# Altium PCB Wikiot-III.PcbDoc (part 1 of 2)
Units mil, origin at the board's own origin, x right, y up, seen from the top; angles counter-clockwise.
Board outline 3930 x 3935 mil, 2 copper layers (Top Layer, Bottom Layer); 211 components, 261 nets, 942 pads, 236 vias.
Unrouted connection lines stored in the file: 45.
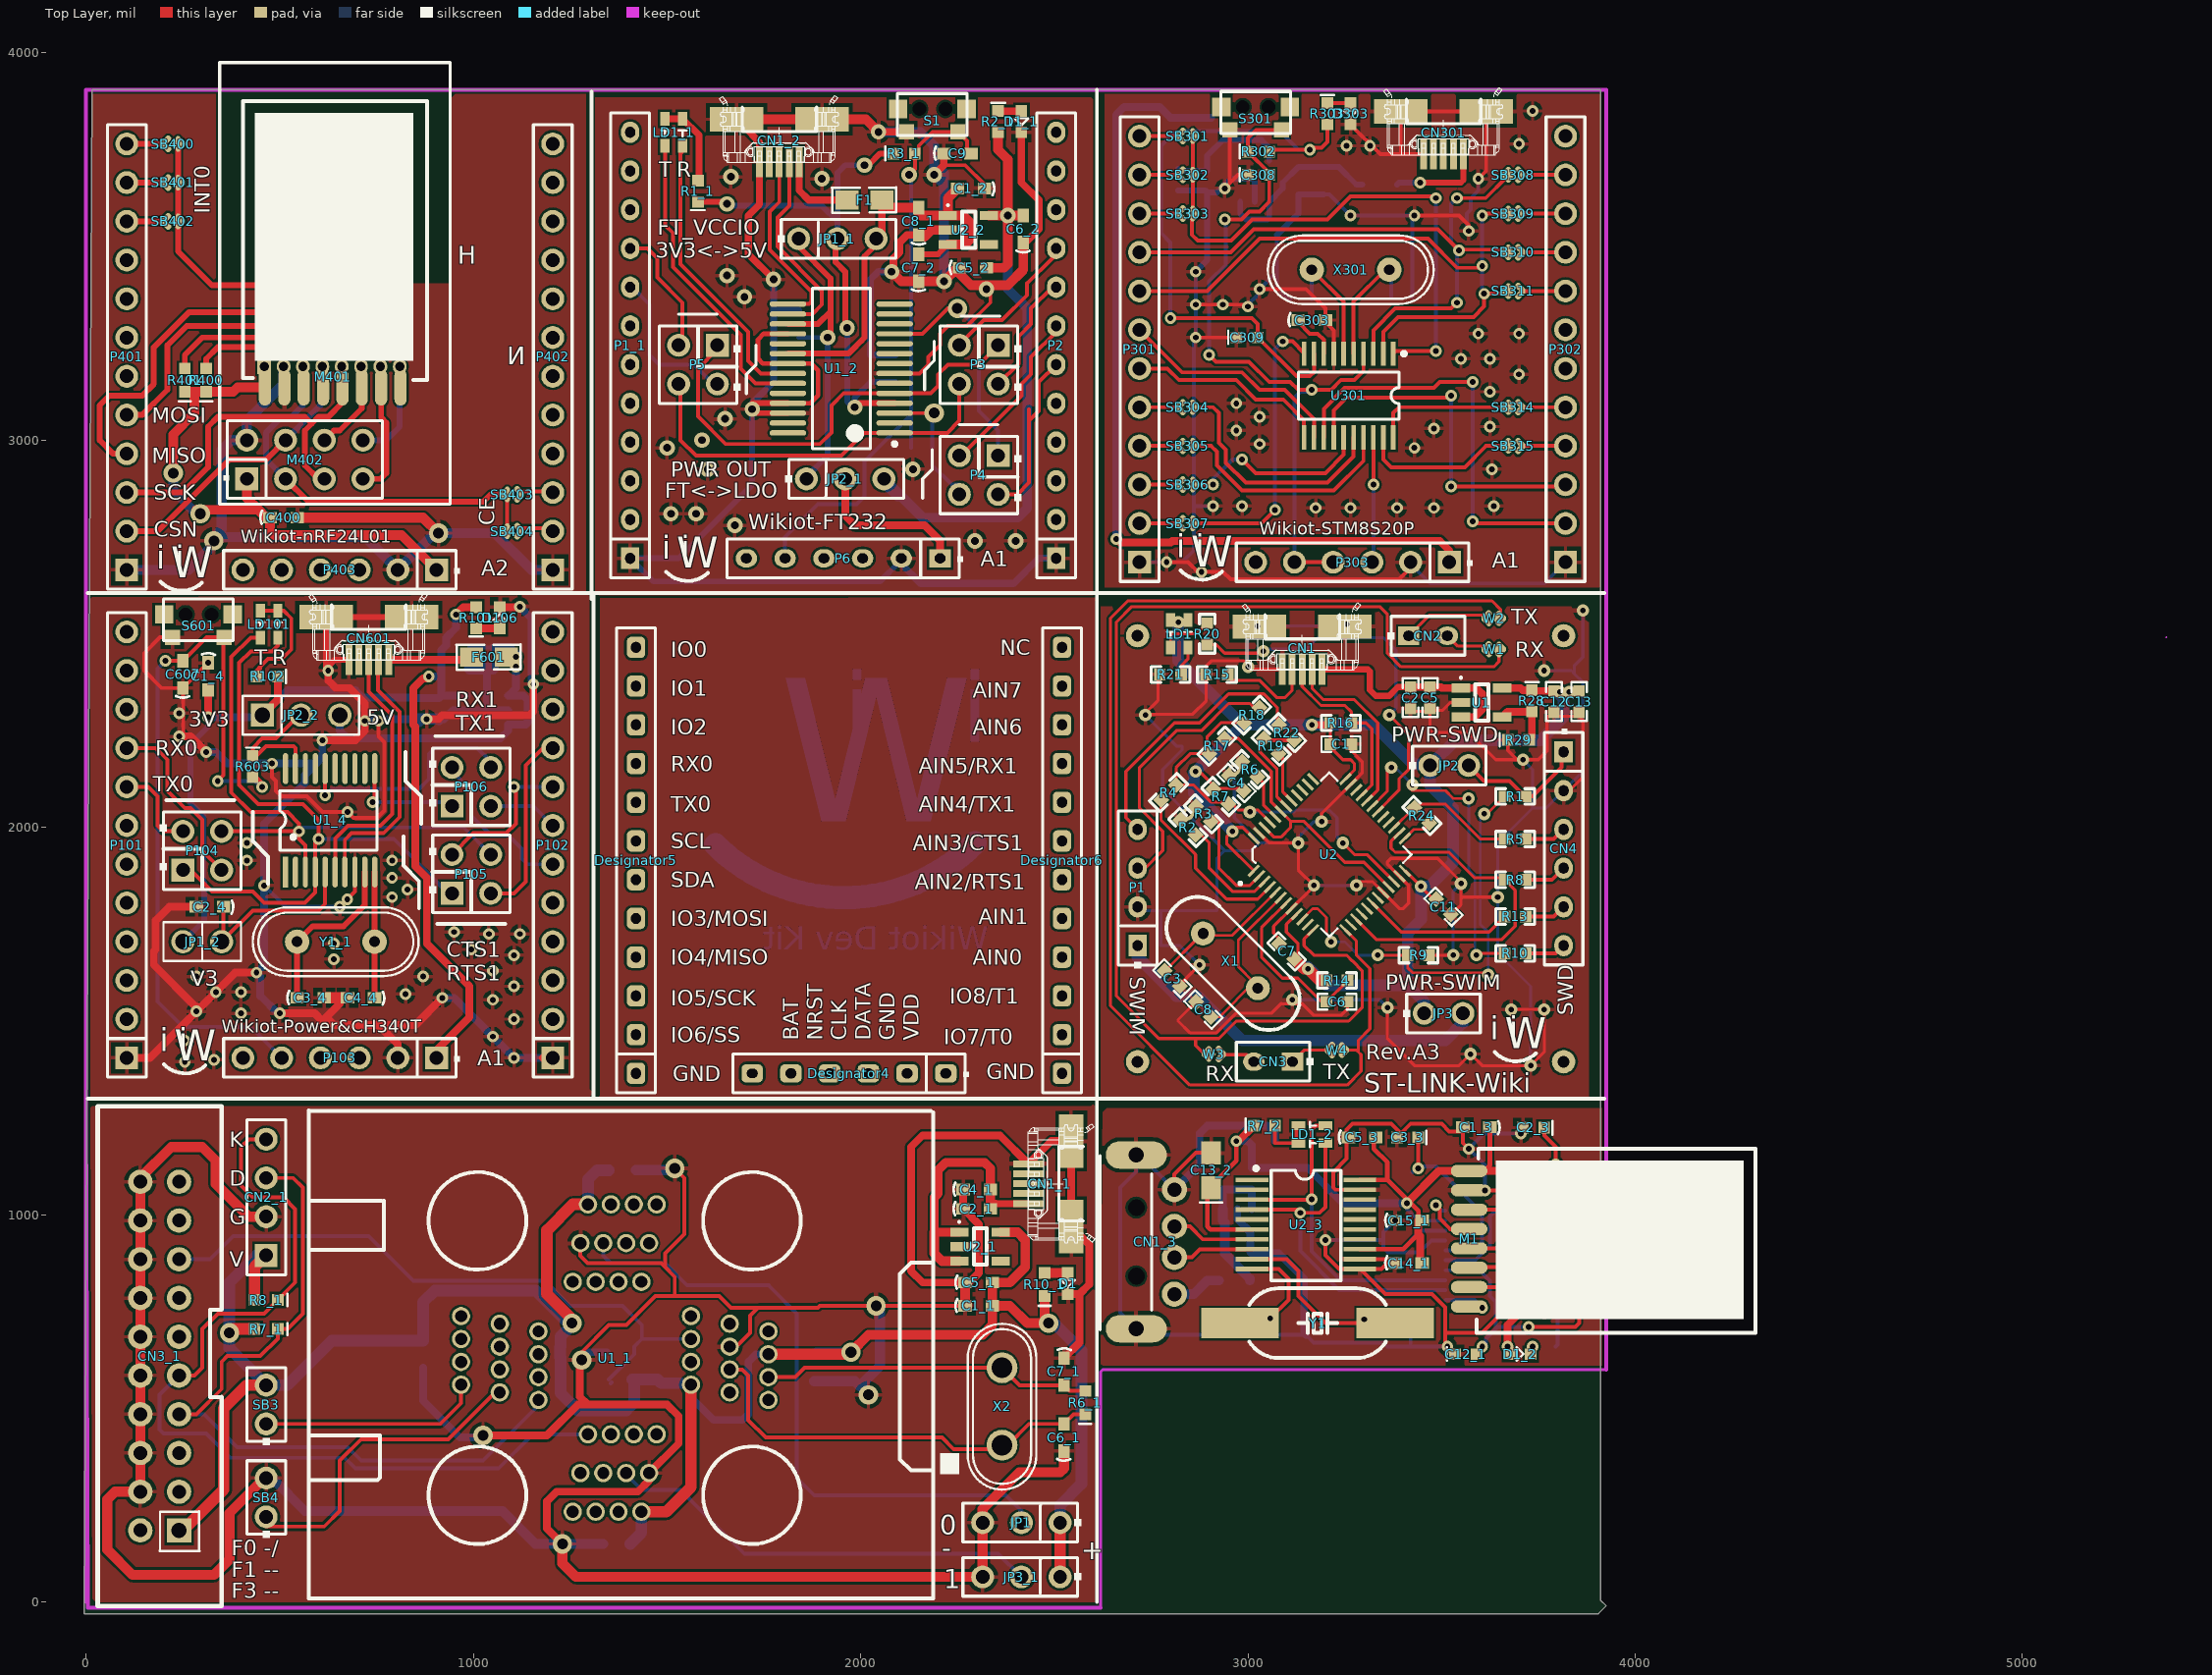
[diagram p0: Top Layer view]
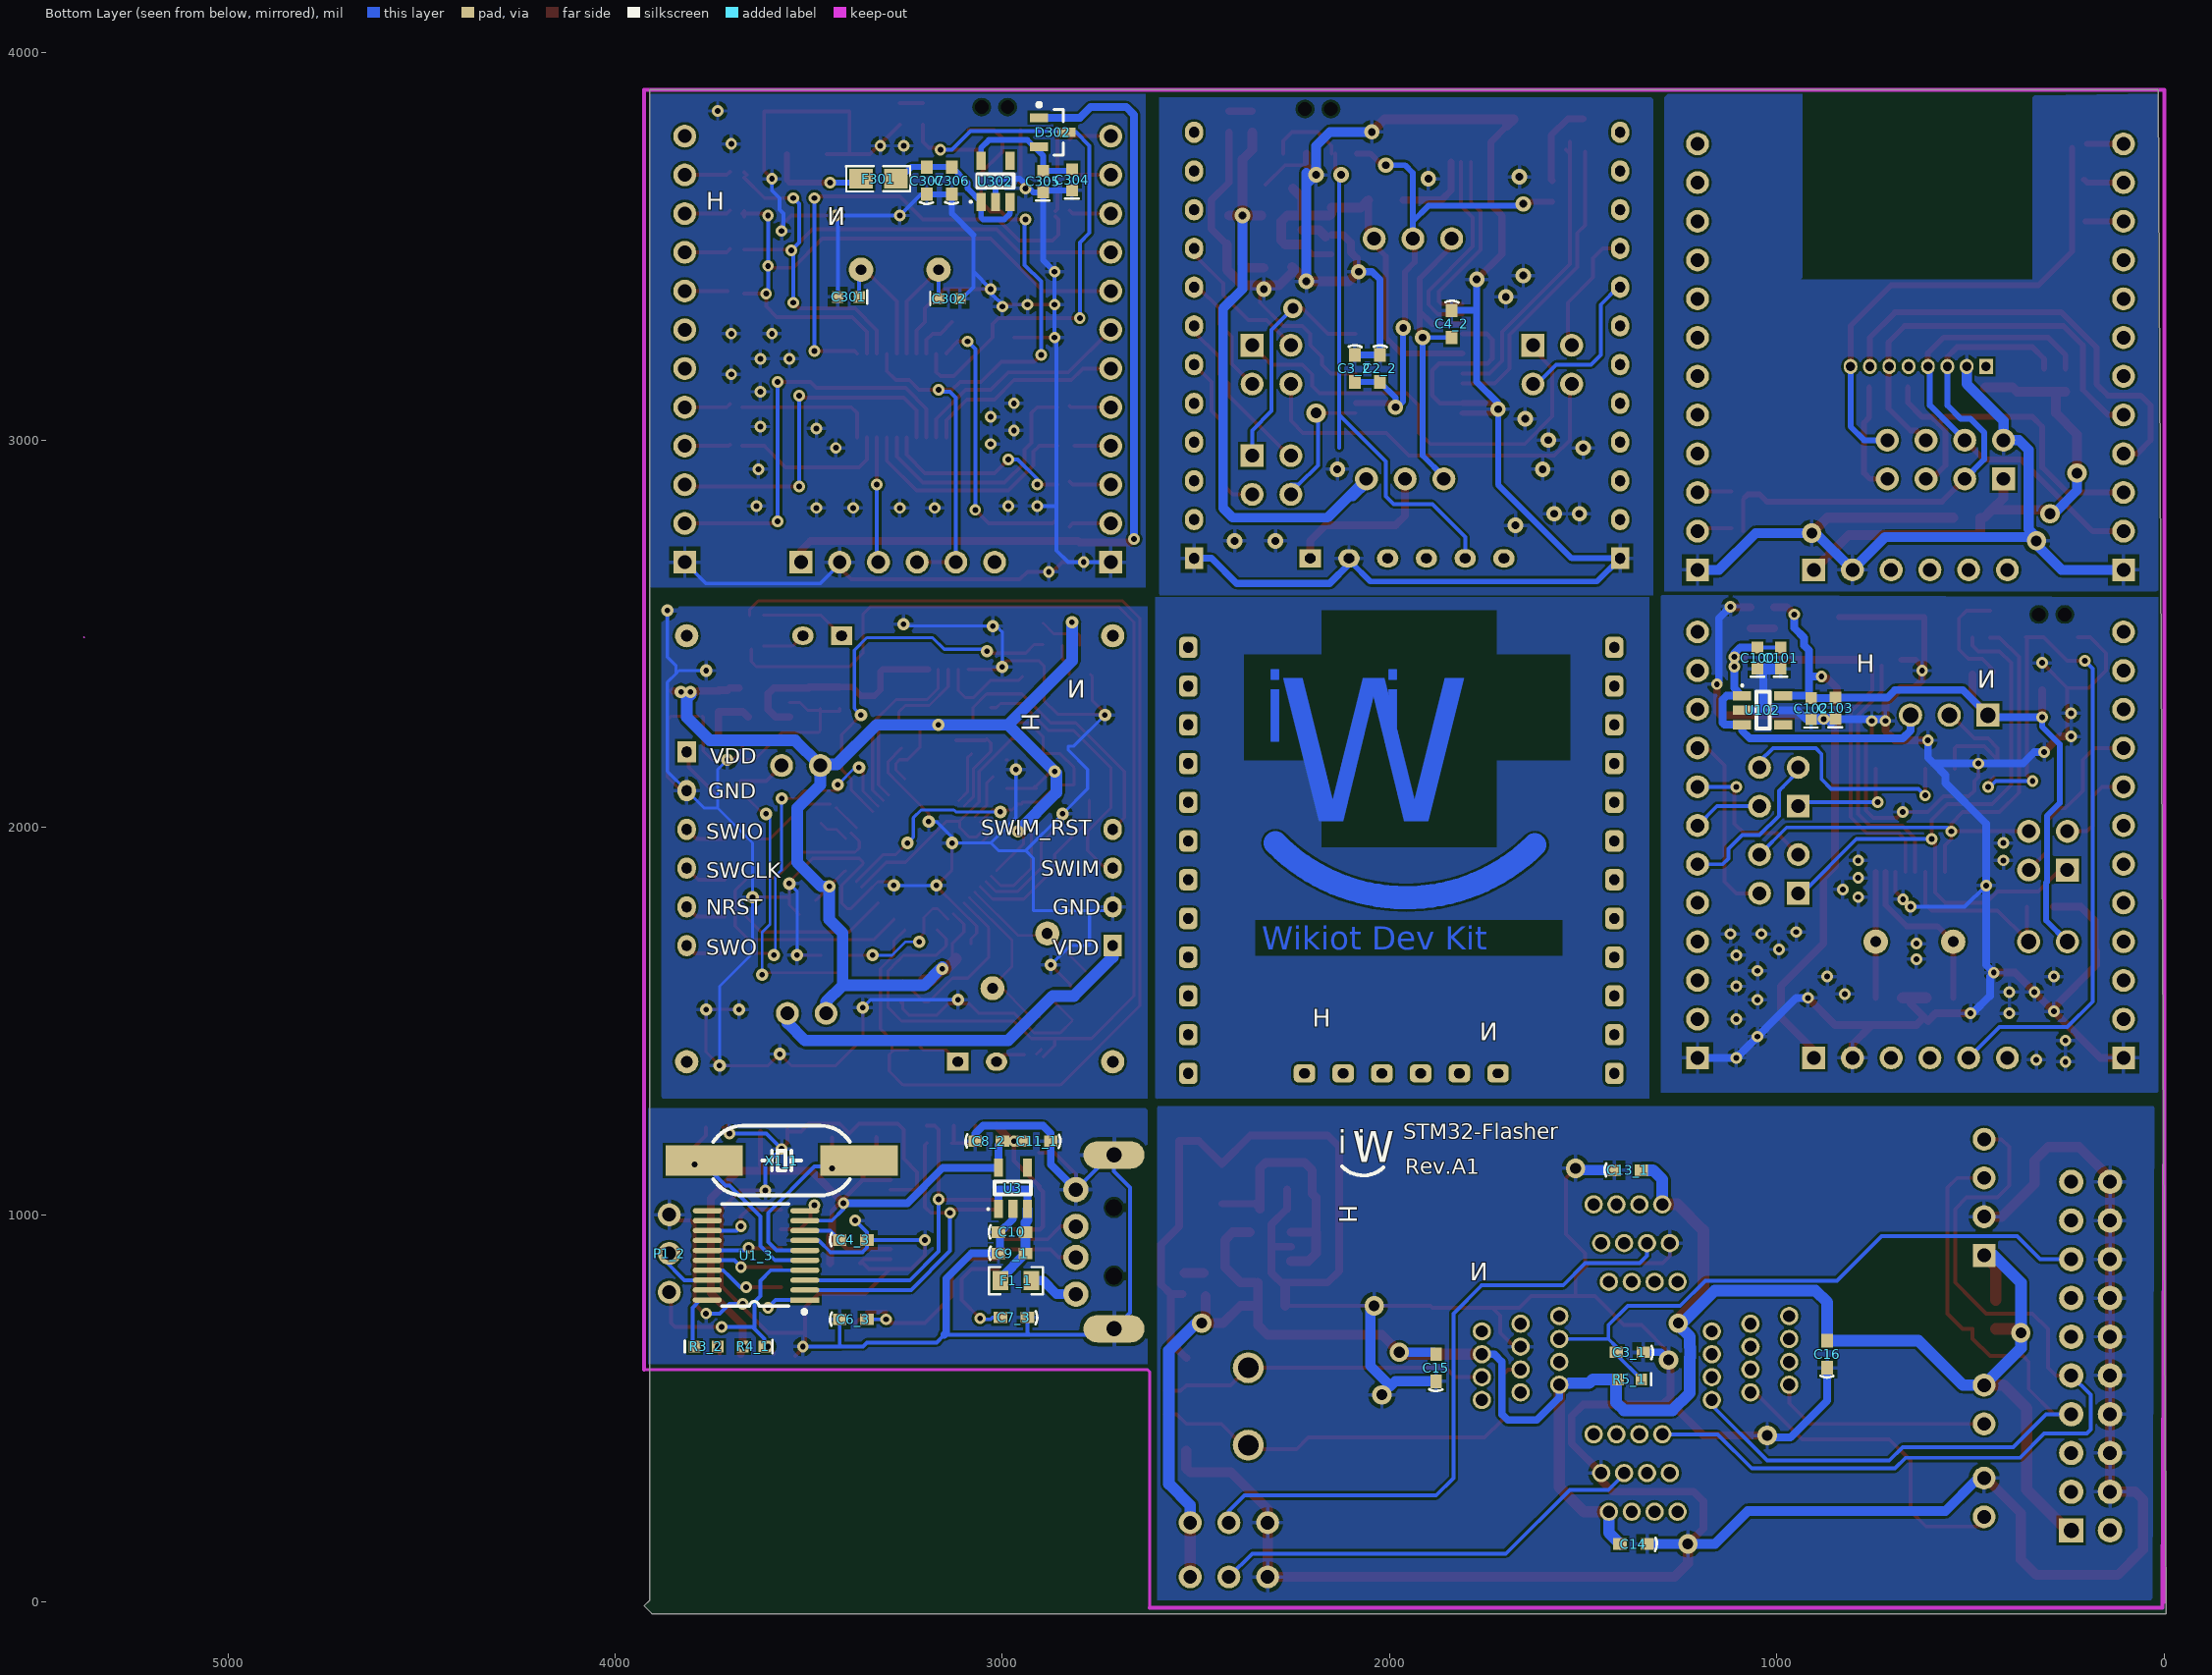
[diagram p1: Bottom Layer view, seen from below]
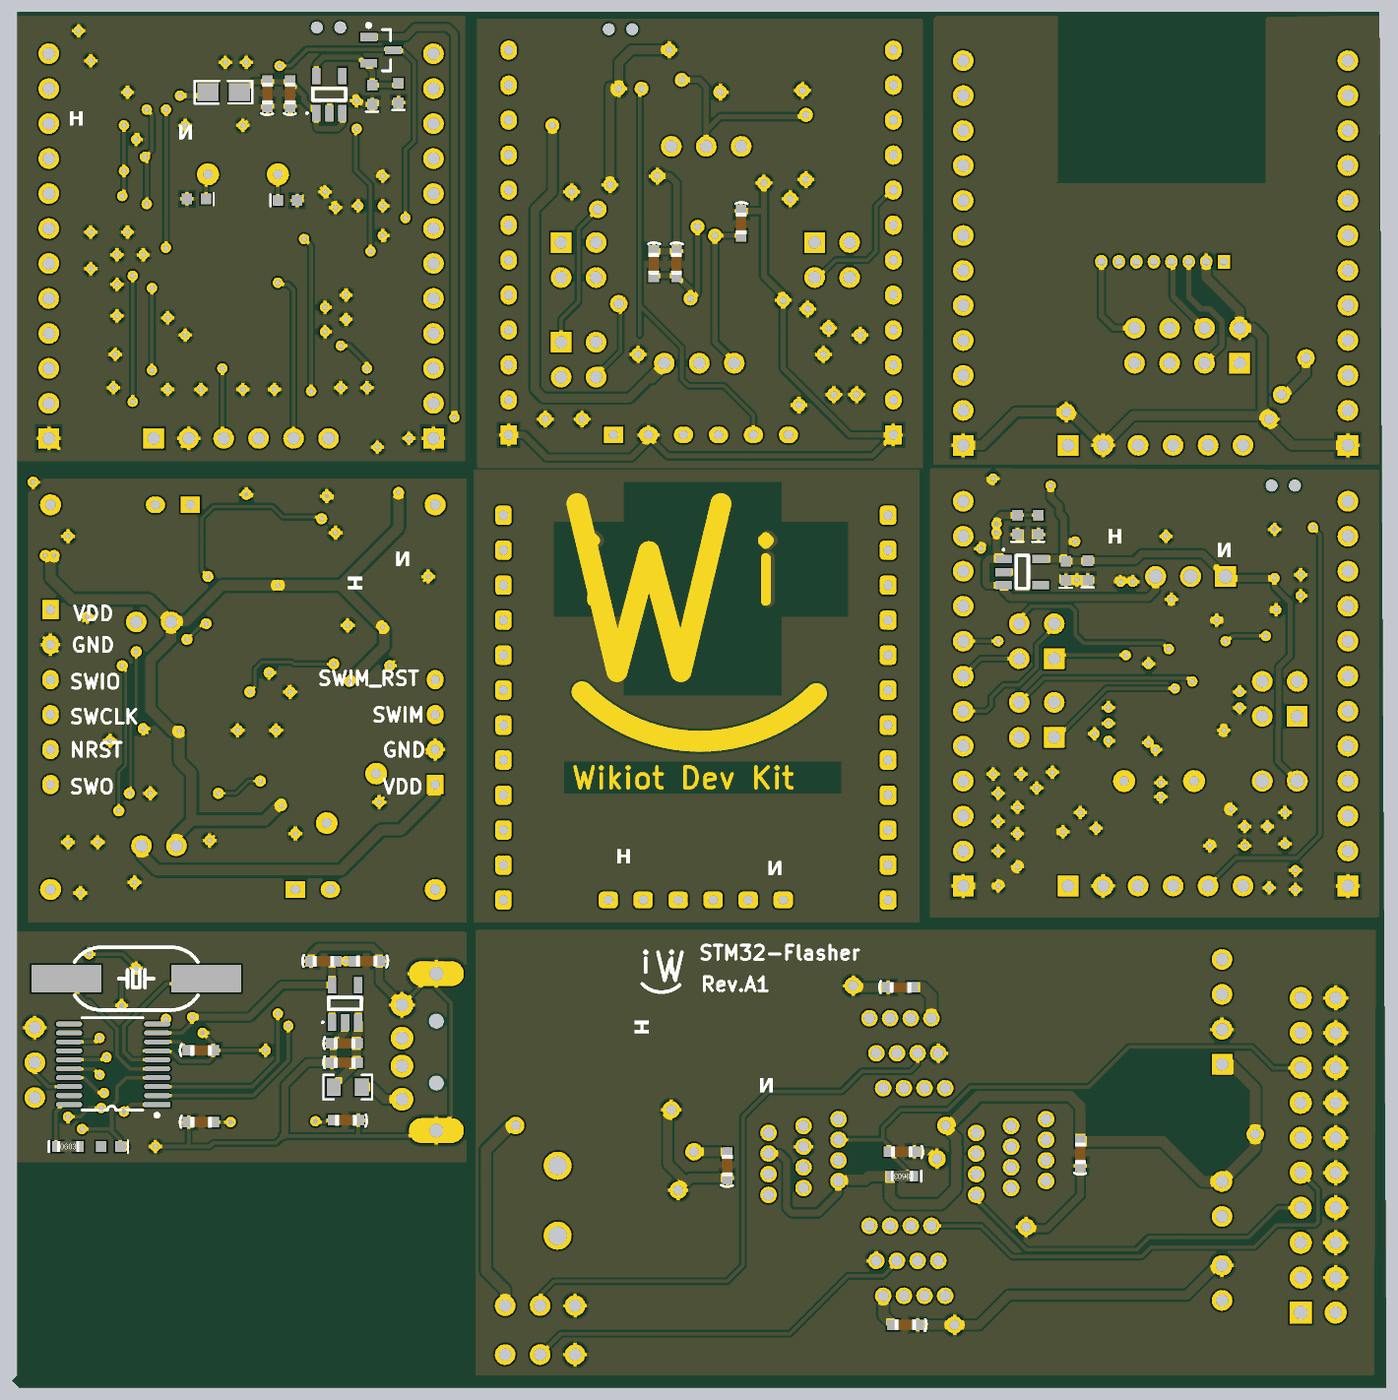
[diagram p3: 3D render of the assembled board from below, using the file's embedded part models]

## Layer stack, top to bottom
Top Solder: solder mask 0.4, Solder Resist, Dk 3.5
Top Layer: signal copper 1.4
Dielectric1: dielectric 12.6, FR-4, Dk 4.8
Bottom Layer: signal copper 1.4
Bottom Solder: solder mask 0.4, Solder Resist, Dk 3.5

## Board outline
15,3905 3910,3905 3910,5 3925,-10 3905,-30 -5,-30

## Design rules (kind name [scope] priority, off if disabled: settings)
Clearance [All] p1: gap=6
PolygonConnect [All] p1: connectstyle=Relief reliefconductorwidth=10 reliefentries=4 polygonreliefangle="90 Angle" airgapwidth=10
RoomDefinition Power&CH340T [InComponentClass('Power&CH340T')] p1: confinementstyle=ConfineIn formatcopy=TRUE lockcomponents=FALSE outline 1310,2600 6.92,2600 6.92,1304.21 1310,1304.21
RoomDefinition STM8S103 [InComponentClass('STM8S103')] p2: confinementstyle=ConfineIn formatcopy=TRUE lockcomponents=FALSE outline 2625,2600 3920,2600 3920,3920 2625,3920
RoomDefinition Doggle [InComponentClass('Doggle')] p3: confinementstyle=ConfineIn formatcopy=TRUE lockcomponents=FALSE outline 2605,590 3925,590 3925,1270 2605,1270
RoomDefinition Power&FT232 [InComponentClass('Power&FT232')] p4: confinementstyle=ConfineIn formatcopy=TRUE lockcomponents=FALSE outline 1305,2590 2610,2590 2610,3905 1305,3905
RoomDefinition nRF24L01-Module [InComponentClass('nRF24L01-Module')] p5: confinementstyle=ConfineIn formatcopy=TRUE lockcomponents=FALSE outline 10,2595 1310,2595 1310,4025 10,4025
RoomDefinition STM32-Flasher [InComponentClass('STM32-Flasher')] p6: confinementstyle=ConfineIn formatcopy=TRUE lockcomponents=FALSE outline 5,-25 2625,-25 2625,1300 5,1300
RoomDefinition ST_LINK-Wiki [InComponentClass('ST_LINK-Wiki')] p7: confinementstyle=ConfineIn formatcopy=TRUE lockcomponents=FALSE outline 2605,1290 3905,1290 3905,2605 2605,2605
RoutingVias [All] p1: holewidth=12 width=25 viastyle="Through Hole" minholewidth=12 minwidth=25 maxholewidth=28 maxwidth=50
SolderMaskExpansion [All] p1: expansion=4
UnpouredPolygon [All] p1: allowunpoured=FALSE
Width [All] p1: maxlimit=55 minlimit=7 preferedwidth=10
29 further rules are at their usual default settings.

## Classes and differential pairs
component class Power&CH340T: BT? CN? LS? U?

## Components (designator, comment, footprint, x,y, rotation, side; value= is the part's Value field where it differs from the comment)
C1 "100nF" 0603C 3240,2215 r0 top (schematic designator C7)
C1_1 "Cap" C0603L 2305,765 r0 top (schematic designator C1)
C1_2 "Cap" C0603L 2285,3650 r180 top (schematic designator C1)
C1_3 "0.1uF" C0603L 3590,1225.79 r180 top (schematic designator C1)
C1_4 "Cap" C0603L 315,2390 r270 top (schematic designator C1)
C2 "1uF_X5R_0603" 0603C 3420,2335 r270 top (schematic designator C9)
C2_1 "Cap" C0603L 2300,1015 r0 top (schematic designator C2)
C2_2 "Cap" C0603L 2025,3185 r270 bottom (schematic designator C2)
C2_3 "20pF" 0603M 3765,1225 r180 top (schematic designator C2)
C2_4 "Cap" C0603L 320,1795 r180 top (schematic designator C2)
C3 "20pF" 0603C 2805,1610 r135 top (schematic designator C2)
C3_1 "Cap" C0603L 1380,645 r0 bottom (schematic designator C3)
C3_2 "Cap" C0603L 2090,3185 r270 bottom (schematic designator C3)
C3_3 "20pF" 0603M 3440,1200 r180 top (schematic designator C3)
C3_4 "Cap" C0603L 580,1560 r0 top (schematic designator C3)
C4 "100nF" 0603C 2970,2115 r135 top (schematic designator C6)
C4_1 "Cap" C0603L 2300,1065 r0 top (schematic designator C4)
C4_2 "Cap" C0603L 1840,3300 r270 bottom (schematic designator C4)
C4_3 "0.1uF" C0603L 3385,935 r180 bottom (schematic designator C4)
C4_4 "Cap" C0603L 710,1560 r180 top (schematic designator C4)
C5 "100nF" 0603C 3470,2335 r270 top (schematic designator C11)
C5_1 "Cap" C0603L 2305,825 r0 top (schematic designator C5)
C5_2 "1uF" C0603L 2290,3445 r0 top (schematic designator C5)
C5_3 "0.1uF" C0603L 3295,1200 r0 top (schematic designator C5)
C6 "100nF" 0603C 3230,1550 r0 top (schematic designator C4)
C6_1 "Cap" C0603L 2525,425 r90 top (schematic designator C6)
C6_2 "0.1uF" C0603L 2420,3545 r90 top (schematic designator C6)
C6_3 "Cap" C0603L 3385,730 r180 bottom (schematic designator C6)
C7 "100nF" 0603C 3100,1680 r135 top (schematic designator C8)
C7_1 "Cap" C0603L 2525,595 r270 top (schematic designator C7)
C7_2 "0.1uF" C0603L 2150,3445 r90 top (schematic designator C7)
C7_3 "Cap" C0603L 2970,735 r0 bottom (schematic designator C7)
C8 "20pF" 0603C 2885,1530 r315 top (schematic designator C1)
C8_1 "1uF" C0603L 2150,3565 r90 top (schematic designator C8)
C8_2 "Cap" C0603L 3035,1190 r180 bottom (schematic designator C8)
C9 "1uF" C0603L 2250,3740 r0 top
C9_1 "Cap" C0603L 2975,900 r180 bottom (schematic designator C9)
C10 "Cap" C0603L 2975,955 r180 bottom
C11 "100nF" 0603C 3505,1795 r315 top (schematic designator C5)
C11_1 "Cap" C0603L 2910,1190 r0 bottom (schematic designator C11)
C12 "100nF" 0603C 3790,2325 r270 top (schematic designator C13)
C12_1 "100nF" 0603M 3535,640 r0 top (schematic designator C12)
C13 "1uF_X5R_0603" 0603C 3855,2325 r90 top (schematic designator C10)
C13_1 "Cap" C0603L 1385,1115 r180 bottom (schematic designator C13)
C13_2 "1uF" 0805M 2905,1070 r90 top (schematic designator C13)
C14 "Cap" C0603L 1370,150 r0 bottom
C14_1 "Cap" C0603L 3415,875 r0 top (schematic designator C14)
C15 "Cap" C0603L 1880,605 r90 bottom
C15_1 "Cap" C0603L 3415,985 r0 top (schematic designator C15)
C16 "Cap" C0603L 870,640 r90 bottom
C100 "1uF" 0603M 1050,2410 r90 bottom
C101 "0.1uF" 0603M 990,2410 r90 bottom
C102 "1uF" 0603M 911.44,2278.92 r90 bottom
C103 "0.1uF" 0603M 848.8,2280 r90 bottom
C301 "20pF" 0603M 3370,3370 r0 bottom
C302 "20pF" 0603M 3165,3365 r180 bottom
C303 "0.1uF" C0603L 3165,3310 r0 top
C304 "1uF" 0603M 2820,3645 r90 bottom
C305 "0.1uF" 0603M 2895,3640 r90 bottom
C306 "Cap" C0603L 3130,3670 r90 bottom
C307 "Cap" C0603L 3195,3670 r90 bottom
C308 "100nF" 0603M 3000,3685 r0 top
C309 "0.1uF" 0603M 2970,3265 r0 top
C400 "0.1uF" C0603L 510,2800 r0 top
C607 "1uF" C0603L 250,2395 r90 top
CN1 "USB-Micro" USB-MICRO-Lite 3140,2515 r0 top (schematic designator CN3)
CN1_1 "USB-Micro" USB-MICRO-Female-Lite 2540,1080 r270 top (schematic designator CN1)
CN1_2 "USB-Micro" USB-MICRO-Female-Lite 1790,3825 r0 top (schematic designator CN1)
CN1_3 "USB" USB-A-Male 2710,1155 r180 top (schematic designator CN1)
CN2 "" HDR1X2-L/2.54MM 3415,2495 r0 top
CN2_1 "HDR1x4" HDR1x4 465,895 r90 top (schematic designator CN2)
CN3 "" HDR1X2-L/2.54MM 3115,1395 r180 top
CN3_1 "JTAG 20Pin" DC3/20P/2.54mm 140,185 r90 top (schematic designator CN3)
CN4 "Header 6X1" HDR1X6-L/2.54MM#1 3815,2195 r270 top (schematic designator CN1)
CN301 "USB-Micro" USB-MICRO-Female-Lite 3505,3845 r0 top
CN601 "USB-Micro" USB-MICRO-Female-Lite 730,2540 r0 top
D1 "LED1" 0603pn 2535,850 r270 top
D1_1 "RED" 0603pn 2415,3850 r270 top (schematic designator D1)
D1_2 "LED1" 0603pn 3675,640 r0 top (schematic designator D1)
D106 "RED" 0603pn 1068.36,2513.92 r90 top
D302 "BAT54C" BAT54C 2870,3795 r180 bottom
D303 "RED" 0603pn 3265,3870 r270 top
Designator4 "Comment" HDR1X6-L/2.54MM#2 2220,1365 r180 top locked
Designator5 "Comment" HDR1X12-L/2.5MM 1420,1365 r90 top locked
Designator6 "Comment" HDR1X12-L/2.5MM 2520,1365 r90 top locked
F1 "500mA" 0805#1 2055,3620 r180 top
F1_1 "500mA" 0805#2 2965,830 r90 bottom (schematic designator F1)
F301 "500mA" 0805#1 3275,3675 r0 bottom
F601 "500mA" 0805#1 1085,2440 r180 top
JP1 "Jumper3" HDR1X3/2.54MM 2515,205 r180 top
JP1_1 "Jumper3" HDR1X3/2.54MM 1840,3520 r0 top (schematic designator JP1)
JP1_2 "Jumper2-2" SIP2 350,1705 r180 top (schematic designator JP1)
JP2 "" HDR1X2/2.54mm 3470,2160 r0 top
JP2_1 "Jumper3" HDR1X3/2.54MM 1860,2900 r0 top (schematic designator JP2)
JP2_2 "Jumper3" SIP3 455,2290 r0 top (schematic designator JP2)
JP3 "" HDR1X2/2.54mm 3455,1520 r0 top
JP3_1 "Jumper3" HDR1X3/2.54MM 2515,65 r180 top (schematic designator JP3)
LD1 "LTST-C195KGJRKT" 0805-LED-Bi 2820,2460 r90 top
LD1_1 "LTST-C195KGJRKT" 0805-LED-Bi 1515,3755 r90 top (schematic designator LD1)
LD1_2 "LTST-C195KGJRKT" 0805-LED-Bi 3205,1205 r180 top (schematic designator LD1)
LD101 "LTST-C195KGJRKT" 0805-LED-Bi 470,2485 r90 top
M1 "nRF24L01-Mini" nRF24L01-Mini-SMD 3590,1115 r0 top
M401 "nRF24L01-Mini" nRF24L01-Mini-All 460,3155 r90 top
M402 "nRF24L01-Mini" nRF24L01-DIP 345,2835 r270 top
P1 "Header 4" HDR1X4-L/2.54MM 2715,1695 r90 top
P1_1 "Synio Header-L 12-Pin" HDR1X12-L/2.54MM 1405,2695 r90 top (schematic designator P1)
P1_2 "SWIM Header 4-Pin" HDR1X3-N/2.54mm 3860,1000 r270 bottom (schematic designator P1)
P2 "Synio Header-R 12-Pin" HDR1X12-L/2.54MM 2505,2695 r90 top
P3 "Header 2X2" HDR2X2/2.54MM 2355,3245 r180 top
P4 "Header 2X2" HDR2X2/2.54MM 2355,2960 r180 top
P5 "Header 2X2" HDR2X2/2.54MM 1630,3245 r180 top
P6 "Synio Power Header 6 Pin" HDR1X6-L/2.54MM#1 2205,2695 r180 top
P101 "Synio Header-L 12-Pin" HDR1X12 105,1405 r90 top locked
P102 "Synio Header-R 12-Pin" HDR1X12 1205,1405 r90 top locked
P103 "Synio Power Header 6 Pin" HDR1X6/2.54MM 905,1405 r180 top locked
P104 "Header 2X2" HDR2X2/2.54MM 250,1890 r0 top
P105 "Header 2X2" HDR2X2/2.54MM 945,1830 r0 top
P106 "Header 2X2" HDR2X2/2.54MM 945,2055 r0 top
P301 "Synio Header-L 12-Pin" HDR1X12 2720,2685 r90 top locked
P302 "Synio Header-R 12-Pin" HDR1X12 3820,2685 r90 top locked
P303 "Synio Power Header 6 Pin" HDR1X6/2.54MM 3520,2685 r180 top locked
P401 "Synio Header-L 12-Pin" HDR1X12 105,2665 r90 top
P402 "Synio Header-R 12-Pin" HDR1X12 1205,2665 r90 top
P403 "Synio Power Header 6 Pin" HDR1X6/2.54MM 905,2665 r180 top
R1 "4.7K" 0603R 3690,2080 r180 top (schematic designator R5)
R1_1 "1K" 0603M 1580,3615 r90 top (schematic designator R1)
R2 "10K[N/A]" 0603R 2845,2000 r135 top (schematic designator R6)
R2_1 "1K" 0603M 2355,3850 r270 top (schematic designator R2)
R3 "10K" 0603R 2885,2035 r135 top (schematic designator R4)
R3_1 "10K" 0603M 2085,3740 r0 top (schematic designator R3)
R3_2 "1K" R0603 3765,660 r180 bottom (schematic designator R3)
R4 "NC" 0603R 2795,2090 r45 top
R4_1 "100K" 0603M 3615,660 r0 bottom (schematic designator R4)
R5 "22" 0603R 3690,1970 r0 top (schematic designator R8)
R5_1 "10K" R0603 1380,575 r0 bottom (schematic designator R5)
R6 "100K" 0603R 3005,2150 r135 top (schematic designator R3)
R6_1 "1M" R0603 2580,515 r90 top (schematic designator R6)
R7 "680" 0603R 2930,2080 r315 top
R7_1 "10K" R0603 465,705 r180 top (schematic designator R7)
R7_2 "1K" 0603M 3015,1230 r0 top (schematic designator R7)
R8 "22" 0603R 3690,1865 r0 top (schematic designator R9)
R8_1 "10K" R0603 465,780 r180 top (schematic designator R8)
R9 "4.7K" 0603R 3440,1670 r180 top (schematic designator R7)
R10 "22" 0603R 3690,1675 r0 top
R10_1 "1K5" R0603 2475,820 r90 top (schematic designator R10)
R13 "22" 0603R 3690,1770 r0 top (schematic designator R10)
R14 "100K" 0603R 3230,1605 r0 top (schematic designator R12)
R15 "100K" 0603R 2920,2395 r0 top (schematic designator R26)
R16 "1K5" 0603R 3240,2270 r0 top (schematic designator R23)
R17 "220" 0603R 2920,2210 r45 top
R18 "220" 0603R 3010,2290 r225 top
R19 "220" 0603R 3060,2210 r315 top
R20 "100" 0603R 2895,2500 r270 top (schematic designator R18)
R21 "100" 0603R 2800,2395 r180 top (schematic designator R17)
R22 "220" 0603R 3100,2245 r315 top
R24 "100" 0603R 3449,2031 r315 top (schematic designator R16)
R28 "NC" 0603M 3733,2354 r270 top
R29 "NC" 0603M 3671,2226 r0 top
R101 "1K" 0603M 1007.36,2513.92 r90 top
R102 "1K" 0603M 495,2390 r180 top
R302 "100K" 0603M 3000,3745 r0 top
R303 "1K" 0603M 3205,3870 r270 top
R400 "1K" R0603 310,3155 r90 top
R401 "1K" R0603 255,3155 r90 top
R603 "10K" 0603M 430,2185 r270 top
S1 "RESET" KEY-2x4-SMD 2185,3855 r0 top
S301 "RESET" KEY-2x4-SMD 3020,3860 r0 top
S601 "RESET" KEY-2x4-SMD 290,2550 r0 top
SB3 "Circuit Breaker" HDR1X2/2.54mm 465,460 r90 top
SB4 "Circuit Breaker" HDR1X2/2.54mm 465,220 r90 top
SB301 "Circuit Breaker" JP2_SMD 2845,3785 r0 top
SB302 "Circuit Breaker" JP2_SMD 2845,3685 r0 top
SB303 "Circuit Breaker" JP2_SMD 2845,3585 r0 top
SB304 "Circuit Breaker" JP2_SMD 2845,3085 r0 top
SB305 "Circuit Breaker" JP2_SMD 2845,2985 r0 top
SB306 "Circuit Breaker" JP2_SMD 2845,2885 r0 top
SB307 "Circuit Breaker" JP2_SMD 2845,2785 r0 top
SB308 "Circuit Breaker" JP2_SMD 3685,3685 r180 top
SB309 "Circuit Breaker" JP2_SMD 3685,3585 r180 top
SB310 "Circuit Breaker" JP2_SMD 3685,3485 r180 top
SB311 "Circuit Breaker" JP2_SMD 3685,3385 r180 top
SB314 "Circuit Breaker" JP2_SMD 3685,3085 r180 top
SB315 "Circuit Breaker" JP2_SMD 3685,2985 r180 top
SB400 "Circuit Breaker" JP2_SMD 225,3765 r0 top
SB401 "Circuit Breaker" JP2_SMD 225,3665 r0 top
SB402 "Circuit Breaker" JP2_SMD 225,3565 r0 top
SB403 "Circuit Breaker" JP2_SMD 1100,2860 r180 top
SB404 "Circuit Breaker" JP2_SMD 1100,2765 r180 top
U1 "LDO" SOT23-5 3550,2360 r270 top (schematic designator U2)
U1_1 "STM32F103CxT" QFP48-Socket 1365,630 r90 top (schematic designator U1)
U1_2 "FT232RL" SSOP-28_M 1950,3185 r180 top (schematic designator U1)
U1_3 "STM8S003F3P6" TSSOP20#1 3510,780 r0 bottom (schematic designator U1)
U1_4 "CH340T" SSOP20#1 615,2010 r0 top (schematic designator U1)
U2 "STM32F103CBT6" "QFP48 7X7" 3210,1930 r315 top (schematic designator U1)
U2_1 "LDO" SOT23-5 2255,955 r270 top (schematic designator U2)
U2_2 "LDO" SOT23-5 2225,3580 r270 top (schematic designator U2)
U2_3 "CH341T" SSOP20#2 3150,975 r270 top (schematic designator U2)
U3 "LDO" SOT23-5 3010,1015 r180 bottom
U102 "LDO" SOT23-5 1090,2340 r270 bottom
U301 "STM8S003F3P6" TSSOP20#2 3260,3115 r180 top
U302 "LDO" SOT23-5 3055,3615 r180 bottom
W1 "Jumper2-1" JP2_SMD 3635,2460 r0 top
W2 "Jumper2-1" JP2_SMD 3635,2540 r0 top
W3 "Jumper2-1" JP2_SMD 2912,1415 r180 top
W4 "Jumper2-1" JP2_SMD 3230,1425 r0 top
X1 "8MHz(12pF)" XTAL1 3025,1585 r135 top
X1_1 "8MHz" XTAL-49SMD 3470,1140 r0 bottom (schematic designator X1)
X2 "8MHz" XTAL_socket 2365,505 r90 top
X301 "8MHz" XTAL_49S 3265,3440 r180 top
Y1 "12MHz" XTAL-49SMD 3280,720 r180 top
Y1_1 "XTAL" XTAL_49S 645,1705 r0 top (schematic designator Y1)

## Footprints (in the part's own frame and the unit in brackets; to place one, negate y for a bottom-side part, rotate by r counter-clockwise, add the part's x,y. Pads: shape width x height; smd on the part's side, far side on the other; paste and mask are expansions set on the pad)
0603C [mil]
  rect 30x30 smd: 1(27.5,0) 2(-27.5,0)
  silkscreen extent -50,-20 50,20
0603M [mil]
  rect 30x30 smd: 1(0,0) 2(55,0)
  silkscreen extent -21,-17 -21,18, body extent -5,-15 60,15, height 43
0603pn [mil]
  rect 30x30 smd: 1(0,0) 2(55,0)
  silkscreen extent 19,-17 36,18
0603R [mil]
  rect 30x30 smd: 1(27.5,0) 2(-27.5,0)
  silkscreen extent -50,-20 50,20
0805#1 [mil]
  rect 60x50 smd: 1(0,0) 2(90,0)
  silkscreen extent -37,-33 129,33
0805#2 [mil]
  rect 50x40 smd: 1(0,40) 2(0,-40)
  silkscreen extent -35,-70 35,70
0805-LED-Bi [mm]
  rect 0.9x0.6 smd: 1(0.127,-0.635) 2(0.127,0.508) 3(1.905,0.508) 4(1.905,-0.635)
  silkscreen extent 0.76,-0.89 1.14,0.76, body extent 0.32,-1.02 1.72,0.9, height 1.1
0805M [mil]
  rect 60x50 smd: 1(0,0) 2(90,0)
  silkscreen extent -38,-29 -38,29
BAT54C [mm] "SOT23, 3-Leads, Body 2.9x1.3mm, Pitch 0.95mm, Lead Span 2.5mm, IPC High Density"
  rect 1.2x0.6 smd: 1(-0.9,0.95) 2(-0.9,-0.95) 3(0.9,0)
  silkscreen extent -1.02,-1.5 0.7,1.92, body extent -0.7,-1.5 0.7,1.5, height 1.1
C0603L [mil]
  rect 35x30 smd: 1(-35,0) 2(35,0)
  silkscreen extent -60,-16 -56,18, body extent -31,-16 32,15, height 24
DC3/20P/2.54mm [mm]
  rect 1.6x1.6 hole 1 paste+0: 1(0,-2.54)
  round 1.6 hole 0.9 paste+0: 2(0,0) 3(2.54,-2.54) 4(2.54,0) 5(5.08,-2.54) 6(5.08,0) 7(7.62,-2.54) 8(7.62,0) 9(10.16,-2.54) 10(10.16,0) 11(12.7,-2.54) 12(12.7,0) 13(15.24,-2.54) 14(15.24,0) 15(17.78,-2.54) 16(17.78,0) 17(20.32,-2.54) 18(20.32,0) 19(22.86,-2.54) 20(22.86,0)
  silkscreen extent -4.95,-5.33 27.81,2.79
HDR1X2-L/2.54MM [mm]
  rect 1.4x1.2 hole 0.65 slot 0.7 at 0 deg: 1(0,0)
  oval 1.4x1.2 hole 0.65 slot 0.7 at 0 deg: 2(2.54,0)
  silkscreen extent -1.4,-1.27 3.68,1.27
HDR1X2/2.54mm [mm]
  round 1.5 hole 0.9: 1(0,0) 2(2.54,0)
  silkscreen extent -1.4,-1.27 3.68,1.27
HDR1X3-N/2.54mm [mm]
  round 1.5 hole 0.9: 1(0,0) 2(2.54,0) 3(5.08,0)
HDR1X3/2.54MM [mm]
  round 1.5 hole 0.9: 1(0,0) 2(2.54,0) 3(5.08,0)
  silkscreen extent -1.4,-1.27 6.38,1.27
HDR1x4 [mm] "Connector; Header; 4 Position"
  rect 1.5x1.5 hole 0.9: 1(0,0)
  round 1.5 hole 0.9: 2(2.54,0) 3(5.08,0) 4(7.62,0)
  silkscreen extent -1.27,-1.27 8.89,1.27
HDR1X4-L/2.54MM [mm]
  rect 1.4x1.2 hole 0.65 slot 0.7 at 0 deg: 1(0,0)
  oval 1.4x1.2 hole 0.65 slot 0.7 at 0 deg: 2(2.54,0) 3(5.08,0) 4(7.62,0)
  silkscreen extent -1.52,-1.27 8.84,1.27
HDR1X6-L/2.54MM#1 [mm] "Connector; Header; 6 Position"
  rect 1.4x1.2 hole 0.65 slot 0.7 at 0 deg: 1(0,0)
  oval 1.4x1.2 hole 0.65 slot 0.7 at 0 deg: 2(2.54,0) 3(5.08,0) 4(7.62,0) 5(10.16,0) 6(12.7,0)
  silkscreen extent -1.52,-1.27 13.97,1.27
HDR1X6-L/2.54MM#2 [mm] "Connector; Header; 6 Position"
  rrect50% 1.4x1.2 hole 0.65 slot 0.7 at 0 deg: 1(0,0) 2(2.54,0) 3(5.08,0) 4(7.62,0) 5(10.16,0)
  rrect50% 1.4x1.2 hole 0.6 slot 0.7 at 0 deg: 6(12.7,0)
  silkscreen extent -1.52,-1.27 13.97,1.27
HDR1X6/2.54MM [mm] "Connector; Header; 6 Position"
  rect 1.5x1.5 hole 0.9: 1(0,0)
  round 1.5 hole 0.9: 2(2.54,0) 3(5.08,0) 4(7.62,0) 5(10.16,0) 6(12.7,0)
  silkscreen extent -1.52,-1.27 13.97,1.27
HDR1X12 [mm] "Connector; Header; 12 Position"
  rect 1.5x1.5 hole 0.9: 1(0,0)
  round 1.5 hole 0.9: 2(2.54,0) 3(5.08,0) 4(7.62,0) 5(10.16,0) 6(12.7,0) 7(15.24,0) 8(17.78,0) 9(20.32,0) 10(22.86,0) 11(25.4,0) 12(27.94,0)
  silkscreen extent -1.27,-1.27 29.21,1.27
HDR1X12-L/2.5MM [mm] "Connector; Header; 12 Position"
  rrect50% 1.4x1.2 hole 0.65 slot 0.7 at 0 deg: 1(0,0) 2(2.54,0) 3(5.08,0) 4(7.62,0) 5(10.16,0) 6(12.7,0) 7(15.24,0) 8(17.78,0) 9(20.32,0) 10(22.86,0) 11(25.4,0) 12(27.94,0)
  silkscreen extent -1.27,-1.27 29.21,1.27
HDR1X12-L/2.54MM [mm] "Connector; Header; 12 Position"
  rect 1.4x1.2 hole 0.65 slot 0.7 at 0 deg: 1(0,0)
  oval 1.4x1.2 hole 0.65 slot 0.7 at 0 deg: 2(2.54,0) 3(5.08,0) 4(7.62,0) 5(10.16,0) 6(12.7,0) 7(15.24,0) 8(17.78,0) 9(20.32,0) 10(22.86,0) 11(25.4,0) 12(27.94,0)
  silkscreen extent -1.27,-1.27 29.21,1.27
HDR2X2/2.54MM [mm] "Connector; Header; 2x2 Position"
  rect 1.5x1.5 hole 0.9: 1(0,0)
  round 1.5 hole 0.9: 2(0,2.54) 3(2.54,0) 4(2.54,2.54)
  silkscreen extent -1.52,-1.27 3.81,3.81
JP2_SMD [mil]
  oct 15x30 smd rot 45: 1(-18,-8) 2(18,7)
  oct 15.75x30 smd rot 135: 1(-18,8)
  rect 26x26 smd rot 45: 2(13,0)
  oct 15x30 smd rot 135: 2(18,-7)
KEY-2x4-SMD [mm] "6.8MM,2.8MM,SMD"
  rect 1.2x1.2 smd: 0(-2.25,0) 0(2.25,0)
  rect 1x1 smd: 1(-1.7,-1.5) 2(1.7,-1.5)
  round 0.8 hole 0.9 unplated: MH1(0.85,0) MH2(-0.85,0)
  silkscreen extent -2.29,-1.73 2.29,1.02, body extent -2.28,-1.6 2.29,0.94, height 1.1
nRF24L01-DIP [mm] "Connector; Header; 4x2 Position"
  rect 1.5x1.5 hole 0.9: 1(-1.651,1.778)
  round 1.5 hole 0.9: 2(-4.191,1.778) 3(-1.651,4.318) 4(-4.191,4.318) 5(-1.651,6.858) 6(-4.191,6.858) 7(-1.651,9.398) 8(-4.191,9.398)
  silkscreen extent -28.96,0 0,15.11
nRF24L01-Mini-All [mm]
  oval 2.4x0.8 smd: 1(-0.477,-0.048) 2(-0.477,-1.318) 3(-0.477,-2.588) 4(-0.477,-3.858) 5(-0.477,-5.128) 6(-0.477,-6.398) 7(-0.477,-7.668) 8(-0.477,-8.938)
  rect 1x0.9 hole 0.6: 1(0.889,0)
  oval 1x0.9 hole 0.6: 2(0.889,-1.27) 3(0.889,-2.54) 4(0.889,-3.81) 5(0.889,-5.08) 6(0.889,-6.35) 7(0.889,-7.62) 8(0.889,-8.89)
  silkscreen extent 0,-10.67 18.29,1.4
nRF24L01-Mini-SMD [mm]
  oval 2.4x0.8 smd: 1(-0.477,-0.048) 2(-0.477,-1.318) 3(-0.477,-2.588) 4(-0.477,-3.858) 5(-0.477,-5.128) 6(-0.477,-6.398) 7(-0.477,-7.668) 8(-0.477,-8.938)
  silkscreen extent 0,-10.67 18.29,1.4
"QFP48 7X7" [mm]
  rect 0.2x1 smd: 1(-2.75,-4.25) 2(-2.25,-4.25) 3(-1.75,-4.25) 4(-1.25,-4.25) 5(-0.75,-4.25) 6(-0.25,-4.25) 7(0.25,-4.25) 8(0.75,-4.25) 9(1.25,-4.25) 10(1.75,-4.25) 11(2.25,-4.25) 12(2.75,-4.25) 25(2.75,4.25) 26(2.25,4.25) 27(1.75,4.25) 28(1.25,4.25) 29(0.75,4.25) 30(0.25,4.25) 31(-0.25,4.25) 32(-0.75,4.25) 33(-1.25,4.25) 34(-1.75,4.25) 35(-2.25,4.25) 36(-2.75,4.25)
  rect 1x0.2 smd: 13(4.25,-2.75) 14(4.25,-2.25) 15(4.25,-1.75) 16(4.25,-1.25) 17(4.25,-0.75) 18(4.25,-0.25) 19(4.25,0.25) 20(4.25,0.75) 21(4.25,1.25) 22(4.25,1.75) 23(4.25,2.25) 24(4.25,2.75) 37(-4.25,2.75) 38(-4.25,2.25) 39(-4.25,1.75) 40(-4.25,1.25) 41(-4.25,0.75) 42(-4.25,0.25) 43(-4.25,-0.25) 44(-4.25,-0.75) 45(-4.25,-1.25) 46(-4.25,-1.75) 47(-4.25,-2.25) 48(-4.25,-2.75)
  silkscreen extent -3.81,-5.52 3.81,3.81
QFP48-Socket [mm]
  round 1.2 hole 0.8: 1(-1.75,-5) 2(-2.25,-7.54) 3(-2.75,-10.08) 4(-0.25,-5) 5(-0.75,-7.54) 6(-1.25,-10.08) 7(1.25,-5) 8(0.75,-7.54) 9(0.25,-10.08) 10(2.75,-5) 11(2.25,-7.54) 12(1.75,-10.08) 13(5,-1.75) 14(7.54,-2.25) 15(10.08,-2.75) 16(5,-0.25) 17(7.54,-0.75) 18(10.08,-1.25) 19(5,1.25) 20(7.54,0.75) 21(10.08,0.25) 22(5,2.75) 23(7.54,2.25) 24(10.08,1.75) 25(1.75,5) 26(2.25,7.54) 27(2.75,10.08) 28(0.25,5) 29(0.75,7.54) 30(1.25,10.08) 31(-1.25,5) 32(-0.75,7.54) 33(-0.25,10.08) 34(-2.75,5) 35(-2.25,7.54) 36(-1.75,10.08) 37(-5,1.75) 38(-7.54,2.25) 39(-10.08,2.75) 40(-5,0.25) 41(-7.54,0.75) 42(-10.08,1.25) 43(-5,-1.25) 44(-7.54,-0.75) 45(-10.08,-0.25) 46(-5,-2.75) 47(-7.54,-2.25) 48(-10.08,-1.75)
  silkscreen extent -15.78,-20.88 16.22,20.07
R0603 [mil]
  rect 30x30 smd: 1(-30,0) 2(30,0)
  silkscreen extent -55,-15 -55,15, body extent -31,-16 32,15, height 18
SIP2 [mil]
  round 60 hole 40: 1(0,0) 2(100,0)
  silkscreen extent -50,-50 150,50
SIP3 [mil]
  rect 60x60 hole 40: 1(0,0)
  round 60 hole 40: 2(100,0) 3(200,0)
  silkscreen extent -50,-50 250,50
SOT23-5 [mm]
  rect 0.6x1.2 smd: 1(0,0) 2(0.95,0) 3(1.9,0) 4(1.9,2.7) 5(0,2.7)
  silkscreen extent -0.69,0 2.13,1.8, body extent -0.32,0.7 2.35,2.1, height 1.1
SSOP20#1 [mm]
  rect 0.35x2.032 smd: 1(-2.54,-3.175)
  oval 0.35x2.032 smd: 2(-1.89,-3.175) 3(-1.24,-3.175) 4(-0.59,-3.175) 5(0.06,-3.175) 6(0.71,-3.175) 7(1.35,-3.175) 8(2.01,-3.175) 9(2.66,-3.175) 10(3.31,-3.175) 11(3.31,3.606) 12(2.66,3.606) 13(2.01,3.606) 14(1.36,3.606) 15(0.71,3.606) 16(0.06,3.606) 17(-0.59,3.606) 18(-1.24,3.606) 19(-1.89,3.606) 20(-2.54,3.606)
  silkscreen extent -2.91,-1.75 3.45,2.15
SSOP20#2 [mm] "SSOP, Plastic; 20 Leads; Body Width 5.3 mm; Pitch 0.65 mm"
  rect 0.3x2.15 smd: 1(-2.925,-3.529) 2(-2.275,-3.529) 3(-1.625,-3.529) 4(-0.975,-3.529) 5(-0.325,-3.529) 6(0.325,-3.529) 7(0.975,-3.529) 8(1.625,-3.529) 9(2.275,-3.529) 10(2.925,-3.529) 11(2.925,3.529) 12(2.275,3.529) 13(1.625,3.529) 14(0.975,3.529) 15(0.325,3.529) 16(-0.325,3.529) 17(-0.975,3.529) 18(-1.625,3.529) 19(-2.275,3.529) 20(-2.925,3.529)
  silkscreen extent -3.8,-3.4 3.68,2.29, body extent -3.6,-2.67 3.68,2.93, height 2
SSOP-28_M [mm] "SOP, 28-Leads, Body 10.2x5.3mm, Pitch 0.65mm, IPC Low Density"
  oval 2.4x0.35 smd: 1(-3.5,4.225) 2(-3.5,3.575) 3(-3.5,2.925) 4(-3.5,2.275) 5(-3.5,1.625) 6(-3.5,0.975) 7(-3.5,0.325) 8(-3.5,-0.325) 9(-3.5,-0.975) 10(-3.5,-1.625) 11(-3.5,-2.275) 12(-3.5,-2.925) 13(-3.5,-3.575) 14(-3.5,-4.225) 15(3.5,-4.225) 16(3.5,-3.575) 17(3.5,-2.925) 18(3.5,-2.275) 19(3.5,-1.625) 20(3.5,-0.975) 21(3.5,-0.325) 22(3.5,0.325) 23(3.5,0.975) 24(3.5,1.625) 25(3.5,2.275) 26(3.5,2.925) 27(3.5,3.575) 28(3.5,4.225)
  silkscreen extent -3.63,-5.25 1.9,5.25, body extent -2.8,-5.25 2.8,5.25, height 2
TSSOP20#1 [mm] "20-pin, 4.40 mm body, 0.65 mm pitch"
  rect 1.9x0.356 smd: 1(0,0)
  oval 1.9x0.356 smd: 2(0,-0.65) 3(0,-1.3) 4(0,-1.95) 5(0,-2.6) 6(0,-3.25) 7(0,-3.9) 8(0,-4.55) 9(0,-5.2) 10(0,-5.85) 11(6.4,-5.85) 12(6.4,-5.2) 13(6.4,-4.55) 14(6.4,-3.9) 15(6.4,-3.25) 16(6.4,-2.6) 17(6.4,-1.95) 18(6.4,-1.3) 19(6.4,-0.65) 20(6.4,0)
  silkscreen extent -0.1,-6.3 5.45,0.9
TSSOP20#2 [mm] "Shrink Small Outline; 20 Leads; Body Width 4.4 mm; Pitch 0.65 mm"
  rect 0.3x1.6 smd: 1(-2.925,-2.75) 2(-2.275,-2.75) 3(-1.625,-2.75) 4(-0.975,-2.75) 5(-0.325,-2.75) 6(0.325,-2.75) 7(0.975,-2.75) 8(1.625,-2.75) 9(2.275,-2.75) 10(2.925,-2.75) 11(2.925,2.75) 12(2.275,2.75) 13(1.625,2.75) 14(0.975,2.75) 15(0.325,2.75) 16(-0.325,2.75) 17(-0.975,2.75) 18(-1.625,2.75) 19(-2.275,2.75) 20(-2.925,2.75)
  silkscreen extent -3.75,-2.87 3.3,1.55
USB-A-Male [mil]
  oval 157.48x70.87 hole 39.37: 0(-1.65,449.43) 0(-1.65,0.61)
  round 65 hole 37: 1(-100,360) 2(-100,265) 3(-100,185) 4(-100,90)
  round 31.5 hole 43.31 unplated: MH1(-1.65,136.43) MH2(-1.65,313.6)
  silkscreen extent -41,2 92,452
USB-MICRO-Female-Lite [mm] "Connector; USB2.0, Type B, SM; 5 Position; Right Angle"
  rect 3.5x1.6 smd: 0(-2.802,0.088) 0(2.798,0.088)
  rect 0.45x2 smd: 1(1.298,-2.714) 2(0.648,-2.714) 3(-0.002,-2.714) 4(-0.652,-2.714) 5(-1.302,-2.714)
  silkscreen extent -3.92,-2.74 3.88,1.65
USB-MICRO-Lite [mm] "Connector; USB2.0, Type B, SM; 5 Position; Right Angle"
  rect 3.5x1.6 smd: 0(-2.802,0.088) 0(2.798,0.088)
  rect 0.45x2 smd: 1(1.298,-2.714) 2(0.648,-2.714) 3(-0.002,-2.714) 4(-0.652,-2.714) 5(-1.302,-2.714)
  silkscreen extent -3.92,-2.74 3.88,1.65
XTAL1 [mil]
  round 62 hole 28: 1(-0.36,-0.2) 2(199.64,-0.2)
  silkscreen extent -120,-80 300,80
XTAL-49SMD [mm]
  rect 5.08x2 smd: 1(-2.54,0) 2(7.62,0)
  silkscreen extent -1.94,-2.29 7.02,2.29
XTAL_49S [mm] "Hole 1.6mm"
  round 1.6 hole 0.7: 1(2.54,0) 2(-2.54,0)
  silkscreen extent -5.45,-2.25 5.42,2.25
XTAL_socket [mil]
  round 80 hole 53: 1(100,0) 2(-100,0)
  silkscreen extent -215,-89 214,89

## Part data
C1 C3 C4 C5 C6 C7 C8 C11 C12: library part Capacitor_ST, "Capacitor 0402 / 0603 / 0805"
C1_1 C2_1 C2_3 C3_1 C3_3 C6_1 C7_1 C12_1 C13_1 C14 C15 C16 C301 C302 C308: library part CAP, "Capacitor"
C1_2 C1_4 C2_2 C2_4 C3_2 C3_4 C4_1 C4_2 C4_4 C5_1 C6_3 C7_3 C8_2 C9_1 C10 C11_1 C14_1 C15_1 C306 C307: "Capacitor"
C1_3 C4_3 C5_2 C5_3 C6_2 C7_2 C8_1 C9 C100 C101 C102 C103 C303 C304 C305 C309 C400 C607: library part Cap, "Capacitor"
C2 C13: library part "CAP SMD 0603  X5R 1µF 25V 10%", "0603  X5R 1µF"
C13_2: library part "Cap Pol1", "Polarized Capacitor (Radial)"
CN1_3: "USB A/B FEAML/MALE"
CN2 CN3 JP2 JP3: library part JP2
CN2_1: library part CON4
CN3_1: "20Pin JTAG CONNECTOR"
CN4: "Header, 6-Pin, Single row"
D1 D1_2: "Typical RED GaAs LED"
D1_1 D106 D303: library part LED0, "Typical INFRARED GaAs LED"
D302: "DOUBLE SHOTTKEY DIODES"
F1 F1_1 F301 F601: library part "Fuse 1", "Fuse"
JP1_2: "Jumper2"
LD1 LD1_1 LD1_2 LD101: "Avago, HSMF-A203 Bi-Color LED"
P1: "Header, 4-Pin"
P1_1 P101 P301 P401: "Synio Header-L, 12-Pin"
P1_2: library part "SWIM Header 3-Pin", "Header, 3-Pin"
P2 P102 P302 P402: "Synio Header-R, 12-Pin"
P3 P4 P5 P104 P105 P106: "Header, 2-Pin, Dual row"
R1 R2 R3 R4 R5 R6 R7 R8 R9 R10 R13 R14 R15 R16 R17 R18 R19 R20 R21 R22 R24: library part Resistor_ST, "Resistor 0402 / 0603 / 0805"
R1_1 R2_1 R3_1 R7_2 R28 R29 R101 R102 R303 R603: library part Res2, "Resistor"
R3_2 R400 R401: library part Res, "Resistor"
R4_1 R302: library part res1, "Resistor"
R5_1 R6_1 R7_1 R8_1 R10_1: "Resistor"
S1 S301 S601: library part SW-PB, "Switch"
U1 U2_1 U2_2 U3 U102 U302: library part LDO-SOT23-5, "General LDO SOT23-5"
U1_1: "Cortex M3, 48-pin LQFP"
U1_2: "USB UART IC"
U1_3 U301: library part STM8S103F2P6, "ST 8-bit  Microcontroller"
U2: "Medium-density performance line ARM-based 32-bit MCU with 64KB Flash"
W1 W2 W3 W4: "Jumper Wire"
X1 X1_1 X301 Y1: library part XTAL, "Crystal Oscillator"
X2: library part CRYSTAL, "Crystal"
Y1_1: "Crystal Oscillator"

## Free pads (board coordinates)
  round 60 hole 30: 2(2715,1395) 2(2715,2495) 2(3815,1395) 2(3815,2495)

## Via types
v1: diameter 30, hole 15, Top Layer to Bottom Layer, 149 vias
v2: diameter 32, hole 14, Top Layer to Bottom Layer, 43 vias
v3: diameter 40, hole 20, Top Layer to Bottom Layer, 28 vias
v4: diameter 50, hole 28, Top Layer to Bottom Layer, 16 vias

## Nets (pads, with @x,y where several pads share a name; then routed paths per layer and width w, separated by ;. In a path a pad name is that pad's centre, name@x,y a point inside that pad or via, vN(x,y) a via of type N, cw(c..) or ccw(c..) an arc to the next point about the centre after c; other vN are vias at no path point)
+3V3_ST_LINK: C1.2 C4.2 C7.2 C11.2 C12.2 C13.1 JP2.1 JP3.1 LD1.3 LD1.4 R7.2 R14.2 R16.2 R28.1 U1.5 U2.1 U2.9 U2.24 U2.36 U2.48 | length 3813.5
  Top Layer w8: v2(2865,2145) 2875,2145 2915.55,2104.45 R7.2@2916.66,2105.56 ; R7.2@2911.66,2100.56 C4.2@2989.45,2100.56 ; U2.1@3015.13,1888.24 2945,1958.37 2945,1975.56 2969.45,2000 2986.89,2000 U2.48@3015.13,1971.76 ; U2.9@3126.48,1776.89 3099.5,1749.9 3099.5,1730 3129.5,1700 C7.2@3129.5,1670.5 ; R16.2@3207.5,2265 3212.5,2260 C1.2@3212.5,2215 3212.5,2207.5 3245,2175 3265,2175 3275,2165 3275,2148.11 U2.36@3251.76,2124.87 ; U2.24@3404.87,1888.24 3405.76,1888.24 C11.2@3482.56,1811.45 ; JP2.1@3470,2160 JP2.1@3477.21,2160
  Top Layer w20: v2(3165,2265) R16.2@3207.5,2265 ; 3680.15,2360 3704,2360 3710,2354 R28.1@3733,2354 R28.1@3734.5,2352.5 ; R28.1@3729.5,2352.5 3785,2352.5 3796,2347 v2(3805,2350) ; v2@3830,2352.5 C13.1@3850,2352.5
  Top Layer w30: C7.2@3119.45,1660.56 3145,1635 v2(3155,1635) 3185,1605 R14.2@3202.5,1605
  Bottom Layer w30: v2(2820,2530) 2820,2430 2985,2265 ; v2(2960,1990) 2860.56,2089.45 2860.56,2140.56 v2(2865,2145) 2985,2265 ; v2@3155,1640 v2(3155,1635) 3160,1635 3202.5,1592.5 3412.5,1592.5 ; JP3.1@3455,1510 3455,1550 3412.5,1592.5 ; JP2.1@3470,2160 3470,2110 3530,2050 3530,1910 3468,1848 v2(3447,1848) 3447,1762 3412.5,1727.5 3412.5,1592.5 ; v2@3805,2342.5 3815,2332.5 3815,2285 3755,2225 3535,2225 3473,2163 3427,2163 3325,2265 v2(3165,2265) 3040,2265 2985,2265
  other v2: 3830,2350
ADCIN8/TIM3CH3: U1_1.18
ADCIN9/TIM3CH4: U1_1.19
AIN_1: R1.1 R9.1 U2.10 | length 1122.9
  Top Layer w7: U2.10@3140.4,1762.97 3167.44,1790 3180,1790 3202.78,1767.22 3202.78,1727.22 v2@3225,1705 ; v2(3335,1670) R9.1@3412.5,1670 3412.5,1637.5 3425,1625 3615,1625 v2(3620,1620) v2@3612.5,1612.5 ; v2(3610,2035) 3617.5,2035 R1.1@3662.5,2080
  Bottom Layer w7: v2(3215,1705) 3250,1705 3285,1670 v2(3335,1670) ; v2(3610,2035) 3600,2025 3600,1750 3620,1730 v2(3620,1620)
CE: M1.3 M401.3 M402.3 R400.2 SB403.2 SB404.2 U1_3.13 | length 1627.6
  Top Layer w10: SB403.2@1082,2853 1087,2848 SB404.2@1087,2765 ; M1.3@3571.23,1013.11 3656.89,1013.11 3675,995 v1(3675,970)
  Top Layer w15: R400.2@310,3185 310,3210 340,3240 535,3240 560,3215 M401.3@560,3190 ; M402.3@515,2900 574.12,2840.88 1025.88,2840.88 1045,2860 ; 1065,2860 1045,2860 ; SB403.2@1082,2853 1075,2860 1045,2860
  Bottom Layer w10: v1(3675,970) 3685.86,959.14 U1_3.13@3761.97,959.14
  Bottom Layer w15: M402.3@515,2900 465,2950 465,3020 500,3055 525,3055 560,3090 M401.3@560,3190
CH_CTS: P106.1 U1_4.11 | length 298.3
  Top Layer w10: v1(740,2065) 745.32,2070.32 U1_4.11@745.32,2151.97
  Bottom Layer w10: v1(740,2065) 935,2065 P106.1@945,2055
CH_RTS: P106.4 U1_4.16 | length 615.2
  Top Layer w10: v1(617.36,2082.64) U1_4.16@617.36,2151.97
  Bottom Layer w10: v1(617.36,2082.64) 634.72,2100 860,2100 885,2125 885,2190 900,2205 1010,2205 1045,2170 P106.4@1045,2155
CH_RX: LD101.1 P104.1 P105.1 U1_4.4 | length 1688.6
  Top Layer w10: P104.1@250,1890 270,1890 325,1835 430,1835 460,1805 565,1805 591.77,1831.77 U1_4.4@591.77,1885 591.77,1965 596.77,1960 600,1963.23 v1(600,1970) 600,2020 560,2060 445,2060 395,2110 395,2425 425,2455 480,2455 495,2470 LD101.1@495,2490
  Bottom Layer w10: v1(600,1970) 795,1970 935,1830 P105.1@945,1830
CH_TX: LD101.2 P104.4 P105.4 U1_4.3 | length 1513.7
  Top Layer w10: P104.4@350,1990 v1(550,1990) ; LD101.2@450,2490 425,2490 375,2440 375,2090 425,2040 520,2040 550,2010 v1(550,1990) ; U1_4.3@566.18,1885 566.18,1953.82 550,1970 v1(550,1990)
  Bottom Layer w10: v1(550,1990) 560,2000 975,2000 P105.4@1045,1930
CH_VDD: JP2_2.2 R603.1 U1_4.19 | length 352.1
  Top Layer w10: U1_4.19@540.59,2151.97 540.59,2205 535.59,2210 465,2210 430,2175 430,2205 455,2230 490,2230 540,2280 JP2_2.2@540.59,2279.41
CSN: M1.4 M401.4 M402.4 P401.2 R401.2 U1_3.10 | length 1354.5
  Top Layer w10: v1(3485,1025) 3495,1015 3495,990 3521.89,963.11 M1.4@3571.23,963.11
  Top Layer w15: P401.2@105,2765 185,2765 370,2950 465,2950 M402.4@515,3000 ; R401.2@255,3185 255,3220 300,3265 570,3265 610,3225 M401.4@610,3190
  Bottom Layer w10: v1(3485,1025) 3499.69,1010.31 U1_3.10@3510,1010.31
  Bottom Layer w15: M402.4@515,3000 605,3090 605,3185 M401.4@610,3190
CTS1: P2.7 P4.3 P102.7 P106.3 | length 637.2
  Top Layer w10: P4.3@2255,2960 2260,2960 2415,3115 2415,3145 2440,3170 2440,3215 2505,3280 P2.7@2505,3295 P2.7@2490,3295
  Bottom Layer w10: P106.3@1045,2055 1155,2055 P102.7@1205,2005
CTS2/WKUP/ADCIN0: U1_1.10
D3V3: C1_1.2 C1_3.1 C1_4.2 C5_1.2 C5_2.2 C5_3.2 C6_2.2 C8_2.2 C11_1.2 C13_1.2 C13_2.1 C14.2 C14_1.2 C15.2 C15_1.2 C16.2 C102.2 C103.2 C309.2 C400.1 CN2_1.1 CN3_1.1 D1_2.1 D302.3 JP1.1 JP1_2.2 JP2_1.3 JP2_2.1 JP3_1.1 M1.1 M401.1 M402.1 P103.1 P403.1 R2_1.2 R4_1.2 R5_1.2 R7_1.2 R7_2.1 R8_1.2 R10_1.1 R101.2 R102.1 R302.2 R303.2 R400.1 R401.1 SB3.2 U1_1.1 U1_1.9 U1_1.24 U1_1.48 U1_3.9 U2_1.5 U2_2.5 U2_3.6 U2_3.13 U2_3.20 U3.5 U102.5 U301.9 | length 16540.3
  Top Layer w10: v1(2800,3315) 3010,3315 3025,3300 C309.2@3025,3265 3125,3165 3160,3165 3170.43,3175.43 U301.9@3170.43,3223.27 ; R302.2@3055,3745 3060,3750 v1(3160,3750) ; v1@3160,3745 3170,3755 3190,3755 3205,3770 R303.2@3205,3815
  Top Layer w12: v1(2970,1190) 2970,1140 2905,1075 C13_2.1@2905,1070 2895,1060 2895,970 2902.8,962.2 U2_3.6@3011.06,962.2 ; U2_3.13@3288.94,911.02 3401.02,911.02 3440,950 ; U2_3.20@3288.94,1090.16 3360,1090.16 ; C5_3.2@3325,1200 3325,1170 3360,1135 3360,1090.16 ; C15_1.2@3440,985 3440,1010.16 3360,1090.16 ; M1.1@3610,1113.11 3625,1128.11 C1_3.1@3625,1215
  Top Layer w20: v1(315,2285) C1_4.2@315,2355 ; JP2_2.1@455,2290 495,2330 R102.1@495,2395 ; v1(885,2390) 880,2385 870,2385 844.58,2359.58 844.58,2339.58 844.58,2265.5 850,2260.08 850,1900 880,1870 880,1700 990,1590 990,1510 905,1425 P103.1@905,1405 ; v1(955,2550) 973.92,2568.92 R101.2@1007.36,2568.92 ; v1(2970,1190) 2975,1190 R7_2.1@3015,1230 ; v1(3410,1030) 3493.11,1113.11 M1.1@3571.23,1113.11 3610,1113.11 3681.89,1113.11 3752.5,1042.5 3752.5,797.5 3670,715 v1(3670,660) 3675,655 D1_2.1@3675,640 ; C15_1.2@3440,985 3440,950 3445,945 C14_1.2@3445,875
  Top Layer w25: v4(225,2915) 225,3015 280,3070 280,3125 ; R401.1@255,3125 280,3125 ; v4(295,2810) 285,2820 445,2820 ; M402.1@415,2900 415,2850 445,2820 ; M401.1@461.89,3136.23 391.23,3136.23 380,3125 R400.1@310,3125 280,3125 ; P403.1@905,2665 815,2755 660,2755 485,2755 475,2765 C400.1@475,2800 465,2800 445,2820 ; v4(1975,645) 2020,690 2315,690 2340,715 C1_1.2@2340,765 ; C5_2.2@2325,3445 2370,3445 2380,3455 2380,3725 2355,3750 R2_1.2@2355,3795 ; U2_2.5@2331.3,3580 v3(2380,3580) C6_2.2@2415,3580 ; C5_1.2@2340,825 C1_1.2@2340,765 ; C5_1.2@2350,825 2385,825 2425,865 2425,935 2405,955 U2_1.5@2361.3,955 ; R10_1.1@2475,790 2475,720 v4@2480,715 ; v4(2485,720) 2430,720 2385,765 C1_1.2@2340,765
  Top Layer w30: CN3_1.1@240,185 250,185 355,290 355,500 415,560 SB3.2@465,560 ; v4(370,695) 380,705 R7_1.2@435,705 ; R8_1.2@435,780 435,865 CN2_1.1@465,895 ; v4(1255,720) 1255,730 1190,795 1190,960 1256.85,1026.85 U1_1.24@1296.1,1026.85 ; U1_1.48@1433.9,233.15 1498.15,233.15 1561.85,296.85 U1_1.1@1561.85,561.1 ; U1_1.9@1761.85,639.84 v4@1975,639.84 ; JP3_1.1@2515,65 JP1.1@2515,205
  Bottom Layer w10: v1(2800,3315) 2800,3510 2775,3535 2775,3760 2810,3795 D302.3@2834.57,3795 2834.57,3797.5 3082.5,3797.5 3130,3750 v1(3160,3750) ; v1(3410,1030) 3410,1015 3440.28,984.72 U1_3.9@3510,984.72
  Bottom Layer w15: JP1_2.2@250,1705 305,1760 305,1857.22 302.97,1859.25 302.97,2030 270,2062.97 270,2215 315,2260 v1(315,2285)
  Bottom Layer w20: v1(315,2285) 450,2285 JP2_2.1@455,2290 520,2355 695,2355 715,2335 C103.2@848.8,2335 849.87,2333.92 C102.2@911.44,2333.92 C102.2@917.52,2340 ; v1(885,2390) 912.52,2390 917.52,2385 ; v1(955,2550) 955,2515 930,2490 930,2470 917.52,2457.52 917.52,2385 ; U102.5@983.7,2340 C102.2@917.52,2340 ; 1535,565 1538.9,561.1 U1_1.1@1561.85,561.1 1561.85,528.15 1620,470 1695,470 1710,485 1710,620 1729.84,639.84 U1_1.9@1761.85,639.84 ; v1(2970,1190) C8_2.2@3000,1190 3010,1180 U3.5@3010,1121.3 3153.7,1121.3 3245,1030 v1(3410,1030) ; C102.2@917.52,2340 917.52,2385
  Bottom Layer w25: v4(225,2915) 225,2870 285,2810 v4(295,2810) ; C15.2@1880,640 1885,645 v4(1975,645) ; JP2_1.3@2060,2890 2095,2855 ; JP2_1.3@2060,2900 2160,2800 2405,2800 2430,2825 2430,3340 2380,3390 v3(2380,3580)
  Bottom Layer w30: CN2_1.1@465,895 440,895 370,825 v4(370,695) 370,655 SB3.2@465,560 520,560 635,675 C16.2@870,675 870,774 900,804 1161,804 1245,720 v4(1255,720) 1255,715 1225,685 1225,658.84 1224,657.84 1224,632.16 1225,631.16 1225,540 1270,495 1395,495 1415,515 R5_1.2@1415,565 ; U1_1.24@1296.1,1026.85 1296.1,1091.1 1320,1115 C13_1.2@1350,1115 ; C14.2@1405,150 1433.9,178.9 U1_1.48@1433.9,233.15 ; R5_1.2@1410,575 1475,575 1485,565 1535,565 ; v4(2485,720) 2500,720 2570,650 2570,305 2515,250 JP1.1@2515,205
D5V: C1_2.2 C2_1.2 C4_1.2 C7_2.2 C8_1.2 C9_1.2 C10.2 C100.2 C101.2 C306.2 C307.2 CN1_1.1 F1.1 F1_1.1 F301.1 F601.1 JP1_1.3 JP2_2.3 U1_2.20 U2_1.1 U2_1.3 U2_2.1 U2_2.3 U3.1 U3.3 U102.1 U102.3 U302.1 U302.3 | length 3608.6
  Top Layer w15: U1_2.20@1812.2,3223.39 1968.39,3223.39 2010,3265 ; 2000,3255 2010,3265 ; JP1_1.3@2055,3520 2010,3475 2010,3265 ; C7_2.2@2150,3480 2199.8,3480 U2_2.3@2225,3505.2
  Top Layer w18: C2_1.2@2348.88,1028.88 CN1_1.1@2433.14,1028.88
  Top Layer w20: F601.1@1085,2440 v1(1110,2440) ; JP1_1.3@2055,3520 F1.1@2055,3620 ; C2_1.2@2335,1015 C2_1.2@2348.88,1028.88
  Top Layer w23: U2_1.1@2255,955 2190,955 2190,1045 2200,1055 2200,1115 2220,1135 2320,1135 2335,1120 C4_1.2@2335,1065 C2_1.2@2335,1015
  Top Layer w25: F1.1@2055,3620 2075,3600 C8_1.2@2150,3600 ; C8_1.2@2150,3585 2155,3580 U2_2.1@2225,3580 2265,3580 2280,3565 2280,3515 2270.2,3505.2 U2_2.3@2225,3505.2 ; 2190,955 2190,900 2209.8,880.2 U2_1.3@2255,880.2 ; 2225,3595 2225,3625 C1_2.2@2250,3650
  Bottom Layer w10: C101.2@990,2465 C100.2@1050,2465
  Bottom Layer w15: U302.3@2980.2,3615 2980.2,3584.8 2995,3570 3050,3570 3055,3575 U302.1@3055,3615 3090,3650 3090,3665 C306.2@3130,3705 C307.2@3195,3705 3235,3705 3280,3660 F301.1@3295,3660
  Bottom Layer w20: JP2_2.3@655,2290 655,2250 675,2230 1070,2230 1090,2250 U102.3@1090,2265.2 1135.2,2265.2 1140,2270 1140,2330 1130,2340 U102.1@1090,2340 1110,2360 v1(1110,2440) 1110,2450 1095,2465 C100.2@1050,2465 ; U3.3@2935.2,1015 2935.2,1064.8 3010,1064.8 U3.1@3010,1015
  Bottom Layer w25: U3.3@2935.2,1015 2935.2,984.8 2940,980 C10.2@2940,955 C9_1.2@2940,900 3005,835 F1_1.1@3005,830
  other v1: 1110,2415
D+: CN601.3 U1_4.6 | length 667.7
  Top Layer w10: U1_4.6@642.95,1885 642.95,1971.24 676.72,2005 760,2005 790,2035 790,2290 729.94,2350.06 CN601.3@729.94,2418.14
D-: CN601.2 U1_4.7 | length 664.7
  Top Layer w10: U1_4.7@668.15,1885 668.15,1968.15 685,1985 768.28,1985 810,2026.72 810,2298.28 753.8,2354.49 753.8,2416.41 CN601.2@755.53,2418.14
EX_D3V3: D302.1 JP2_1.2 P6.1 P303.1 | length 2673.2
  Top Layer w20: JP2_1.2@1960,2890 1960,2805 1985,2780 2165,2780 2205,2740 P6.1@2205,2695 ; v1(2660,2745) 2660.94,2745 2670.47,2735.47 2800.47,2735.47 2805,2740 2825,2740 3495,2740 3520,2715 P303.1@3520,2685
  Bottom Layer w20: v1@2660,2740 v1(2660,2745) 2660,3840 2680,3860 2772.4,3860 2800,3832.4 D302.1@2905.43,3832.4
FT_3V3: C4_2.2 JP1_1.1 JP2_1.1 U1_2.17 | length 873.1
  Top Layer w15: U1_2.17@1812.2,3300.16 1890.16,3300.16 1922.5,3332.5 ; JP1_1.1@1840,3520 1840,3500 1922.5,3417.5 v3@1922.5,3277.5
  Bottom Layer w12: C4_2.2@1840,3265 v3(1915,3265)
  Bottom Layer w15: JP2_1.1@1860,2890 1860,2905 1915,2960 v3(1915,3265)
FT_CTS: P4.1 U1_2.11 | length 607.8
  Top Layer w10: U1_2.11@2087.8,3274.57 2159.57,3274.57 2225,3340 v4(2250,3340) v4@2270,3340
  Bottom Layer w10: v4(2250,3340) 2305,3285 2305,3075 2355,3025 P4.1@2355,2985
FT_RTS: P4.4 U1_2.3 | length 330.1
  Top Layer w10: U1_2.3@2087.8,3069.84 2189.84,3069.84 v4(2190,3070)
  Bottom Layer w10: v4(2190,3070) 2185,3065 2185,2935 2235,2885 P4.4@2255,2885
FT_RX: P3.1 P5.1 U1_2.5 | length 1173
  Top Layer w10: P5.1@1630,3245 1630,3235 1580,3185 1580,3061.63 1651.63,2990 1895,2990 1925,3020 1925,3090 1956.02,3121.02 U1_2.5@2087.8,3121.02 2181.02,3121.02 2200,3140 2200,3170 2225,3195 2305,3195 P3.1@2355,3245
FT_TX: P3.4 P5.4 U1_2.1 | length 1003.8
  Top Layer w10: P5.4@1535,3135 1535,3000 1575,2960 1950,2960 2008.66,3018.66 U1_2.1@2087.8,3018.66 2223.66,3018.66 2255,3050 P3.4@2255,3145
FT_VCCIO: C2_2.2 C3_2.2 JP1_1.2 R1_1.1 R3_1.1 U1_2.4 | length 1480
  Top Layer w15: R1_1.1@1580,3615 1650,3615 v3(1655,3610) ; JP1_1.2@1940,3520 1935,3515 1935,3460 1960,3435 v3@1960,3290 ; v3@1960,3295 1955,3290 v3(1965,3290) ; v3(1985,3085) 1995.43,3095.43 U1_2.4@2087.8,3095.43 ; v3@2020,3710 2050,3740 R3_1.1@2085,3740
  Bottom Layer w15: v3(1655,3610) 1655,3605 1900,3605 1940,3565 ; JP1_1.2@1940,3520 1940,3565 ; v3(1965,3290) 1955,3290 1965,3300 1965,3100 1985,3080 v3(1985,3085) 1985,3110 C2_2.2@2025,3150 C3_2.2@2090,3150 ; v3(2010,3710) 1960,3710 1940,3690 1940,3565